# EAGLE board CAN shield (EAGLE 7.7.0)
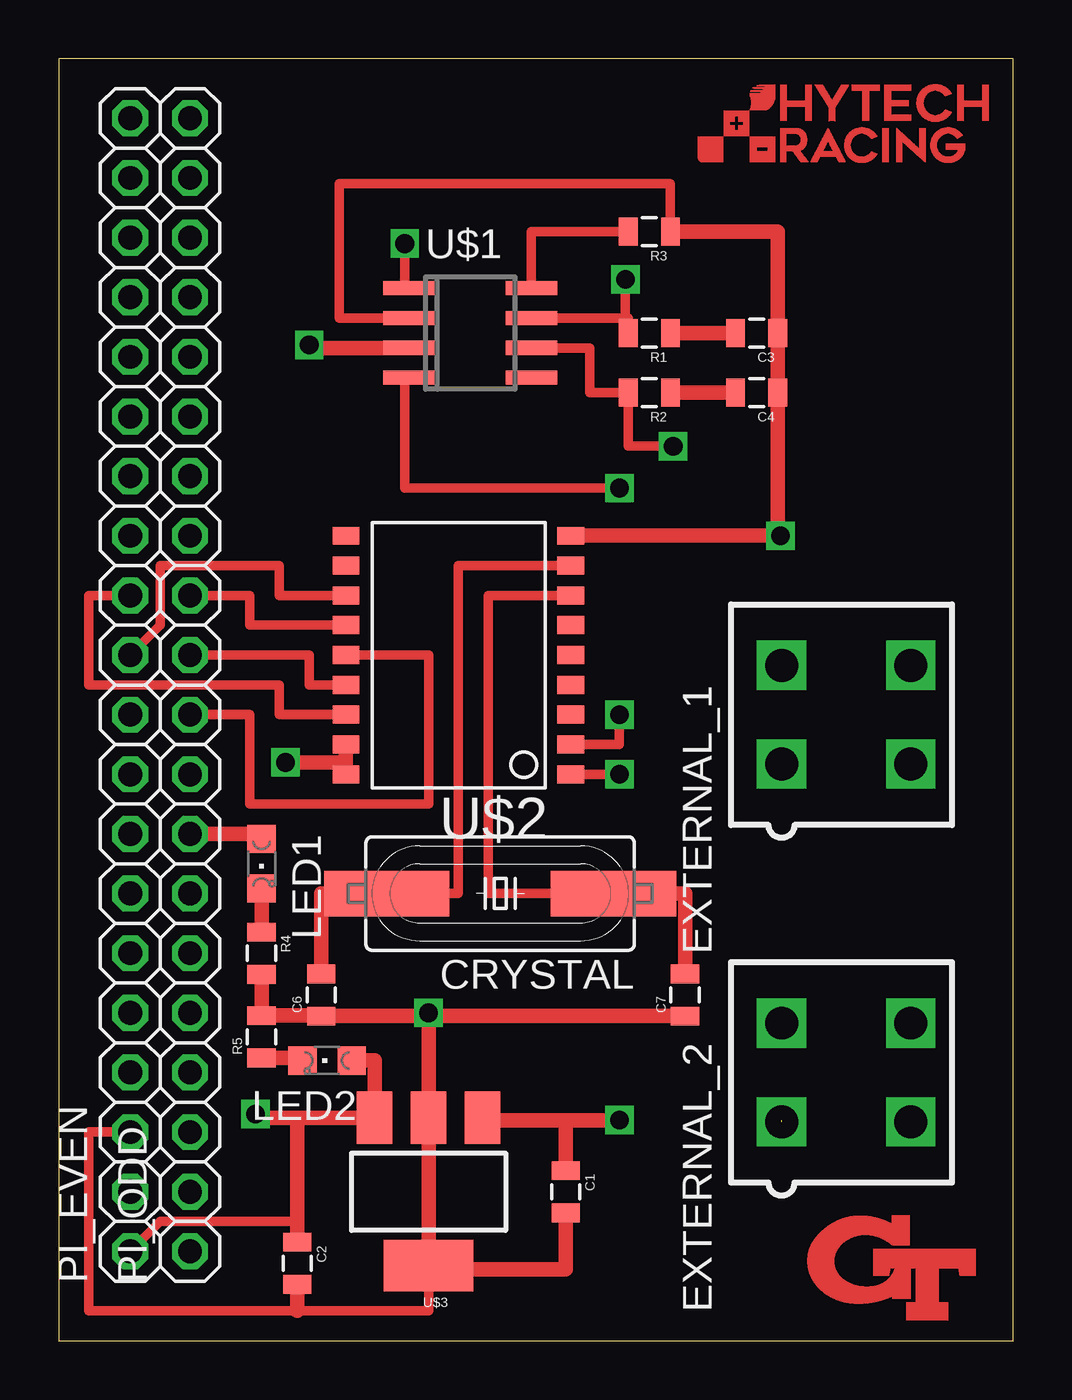
[diagram p0: board, top side]
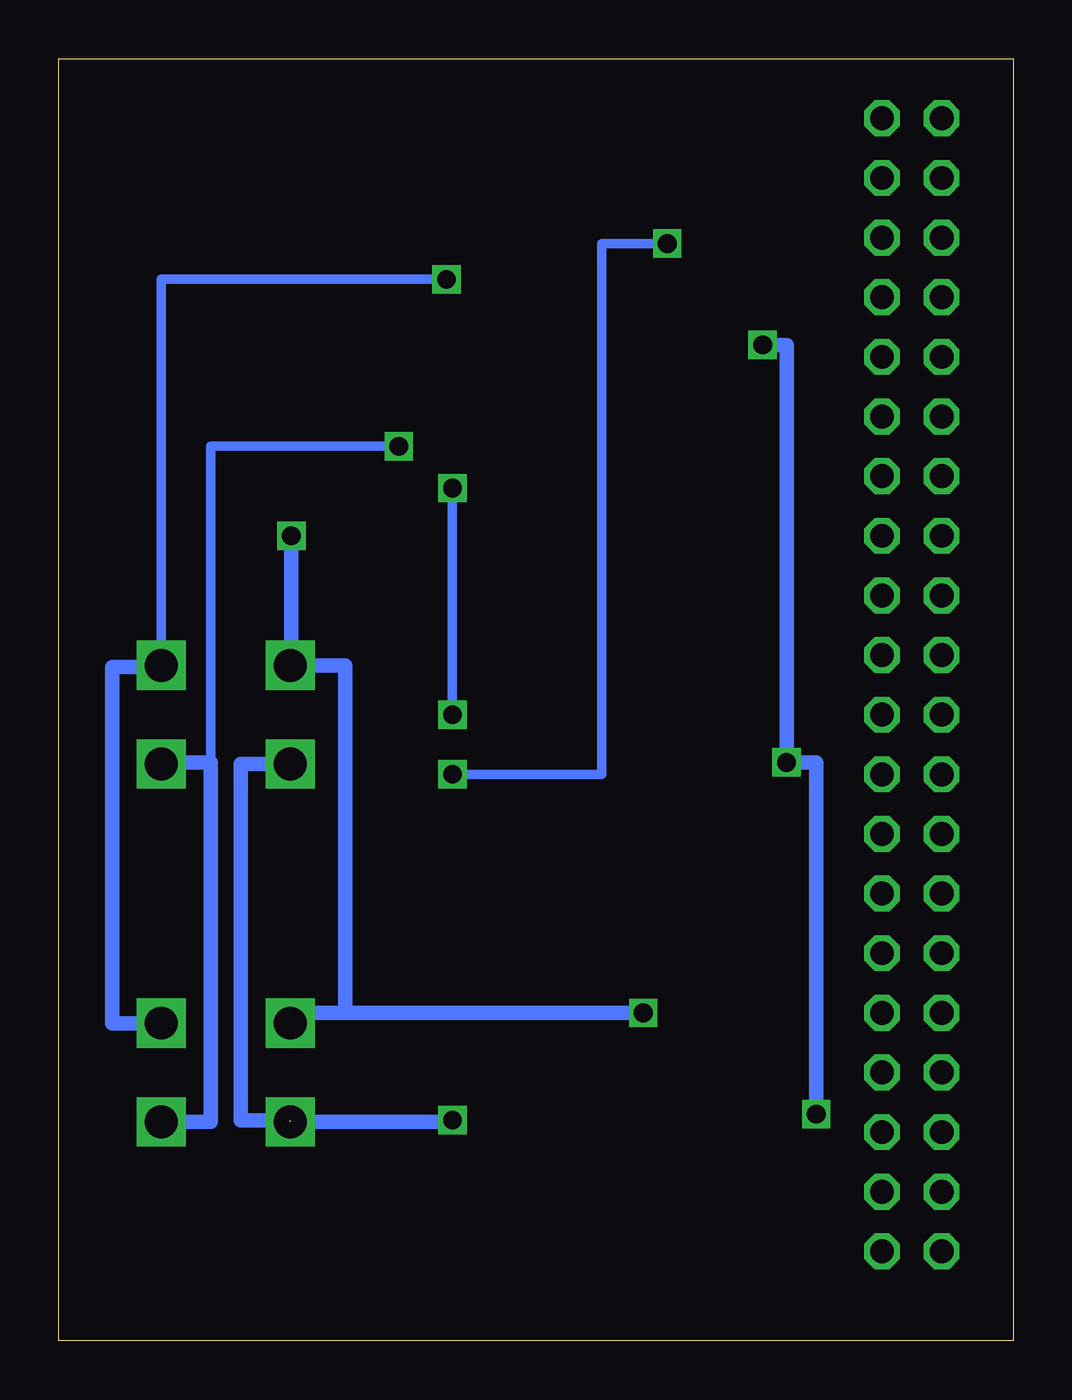
[diagram p1: board, bottom side, seen from below]

Size 40.64 x 54.61 mm. Coordinates in mm from the lower left corner, seen from the top.
Outline: 0,0 40.64,0 40.64,54.61 0,54.61 0,0
Copper layers (1*16): Top 0.035mm / dielectric 1.5mm / Bottom 0.035mm
Design rules "default": minimum track width 10mil, minimum drill 24mil, track to track 8mil, track to pad 8mil, pad to pad 8mil, via to via 8mil, smd to smd 8mil, copper to edge 40mil, drill to drill 8mil, minimum pad ring 10mil, minimum via ring 8mil, stop-mask expansion 4mil, vias tented up to drill 0mil, thermal gap 10mil

## Footprints (pad centres in the part's own frame; a part is rotated, then mirrored left to right if it is on the bottom)
0805 = smd 0.8 x 1.2: 1 -0.9,0; 2 0.9,0
HC49UP = smd 5.334 x 1.93: 1 -4.826,0; 2 4.826,0
MINIFIT_5566-4 = drill 1.4 square: 1 2.1,-2.75; 2 -2.1,-2.75; 3 2.1,2.75; 4 -2.1,2.75
LED-805 = smd 1.2 x 1.2: A 0,-1.05; C 0,1.05
1X20 = drill 1.016 octagon: 1 0,0; 2 2.54,0; 3 5.08,0; 4 7.62,0; 5 10.16,0; 6 12.7,0; 7 15.24,0; 8 17.78,0; 9 20.32,0; 10 22.86,0; 11 25.4,0; 12 27.94,0; 13 30.48,0; 14 33.02,0; 15 35.56,0; 16 38.1,0; 17 40.64,0; 18 43.18,0; 19 45.72,0; 20 48.26,0
SOIC-08 = smd 0.6 x 2.2: 1 -1.905,-2.6; 2 -0.635,-2.6; 3 0.635,-2.6; 4 1.905,-2.6; 5 1.905,2.6; 6 0.635,2.6; 7 -0.635,2.6; 8 -1.905,2.6
SOIC-18W = smd 0.762 x 1.143: 1 -5.08,-4.788; 2 -3.81,-4.788; 3 -2.54,-4.788; 4 -1.27,-4.788; 5 0,-4.788; 6 1.27,-4.788; 7 2.54,-4.788; 8 3.81,-4.788; 9 5.08,-4.788; 10 5.08,4.788; 11 3.81,4.788; 12 2.54,4.788; 13 1.27,4.788; 14 0,4.788; 15 -1.27,4.788; 16 -2.54,4.788; 17 -3.81,4.788; 18 -5.08,4.788
SOT223 = smd 1.5 x 2.235: 1 -2.3,-3.15; 2 0,-3.15; 3 2.3,-3.15 | smd 3.8 x 2.2: 4 0,3.15

## Placement (x,y rotation side)
C1  .22uF  [0805]  21.59,6.35 270 top
C2  .1uF  [0805]  10.16,3.3 270 top
C3  560pF  [0805]  29.72,42.93 180 top
C4  560pF  [0805]  29.72,40.39 180 top
C6  22pF  [0805]  11.18,14.73 90 top
C7  22pF  [0805]  26.67,14.73 90 top
CRYSTAL  16MHz  [HC49UP]  18.8,19.05 180 top
EXTERNAL_1  MINIFIT_5566-4  [MINIFIT_5566-4]  33.53,26.67 270 top
EXTERNAL_2  MINIFIT_5566-4  [MINIFIT_5566-4]  33.53,11.43 270 top
LED1  [LED-805]  8.64,20.32 180 top
LED2  [LED-805]  11.43,11.94 90 top
PI_EVEN  [1X20]  3.05,3.81 90 top
PI_ODD  [1X20]  5.59,3.81 90 top
R1  100  [0805]  25.15,42.93 180 top
R2  100  [0805]  25.15,40.39 180 top
R3  4.7k  [0805]  25.15,47.24 180 top
R4  150  [0805]  8.64,16.51 270 top
R5  150  [0805]  8.64,12.95 90 top
U$1  MCP2551  [SOIC-08]  17.53,42.93 270 top
U$2  MCP2515SMD  [SOIC-18W]  17.02,29.21 90 top
U$3  [SOT223]  15.75,6.35 180 top

## Library data of the parts
C1-C4 C6 C7 LED1 LED2 PI_EVEN PI_ODD R1-R5 U$1-U$3 = HyTechDevices
CRYSTAL = SparkFun-FreqCtrl
EXTERNAL_1 EXTERNAL_2 = HyTechDevices; OC_FARNELL: unknown; OC_NEWARK: unknown

## Nets
5VSUPPLY: C2.1 LED2.A PI_EVEN.1 U$1.3 U$2.17 U$2.18 U$3.3
CAN-H: EXTERNAL_1.4 EXTERNAL_2.4 R1.2 U$1.7
CAN-L: EXTERNAL_1.3 EXTERNAL_2.3 R2.2 U$1.6
CS: PI_EVEN.12 U$2.16
GND: C1.2 C2.2 C3.1 C4.1 C6.1 C7.1 EXTERNAL_1.2 EXTERNAL_2.2 PI_EVEN.3 R3.1 R4.2 R5.2 U$1.2 U$2.9 U$3.2 U$3.4
INT: PI_EVEN.11 U$2.12
N$1: LED1.C R4.1
N$2: PI_ODD.11 U$2.15
N$3: PI_ODD.10 U$2.14
N$4: PI_ODD.12 U$2.13
N$5: C1.1 EXTERNAL_1.1 EXTERNAL_2.1 U$3.1
N$6: LED1.A PI_ODD.8
N$7: LED2.C R5.1
N$11: C6.2 CRYSTAL.2 U$2.8
N$12: U$1.1 U$2.1
N$13: U$1.4 U$2.2
N$14: C3.2 R1.1
N$15: C7.2 CRYSTAL.1 U$2.7
N$16: R3.2 U$1.8
N$17: C4.2 R2.1

## Tracks (layer width: path | path; a pad name or v marks a point on that pad's centre or on a via)
5VSUPPLY  (via drill 0.8)
  Top 0.406: PI_EVEN.1 4.32,5.08 10.16,5.08
  Top 0.61: C2.1 10.16,5.08 10.16,9.5 | 10.16,9.5 U$3.3 13.45,11.94 LED2.A | 10.16,9.5 8.38,9.5 v8.38,9.65 | v9.65,24.64 12.23,24.64 | 12.23,24.64 U$2.17 | 12.23,24.64 U$2.18 | U$1.3 10.67,42.29 v10.67,42.42
  Bottom 0.61: v8.38,9.65 8.38,24.64 v9.65,24.64 9.65,42.42 v10.67,42.42
CAN-H  (via drill 0.8)
  Top 0.406: U$1.7 24.25,43.56 R1.2 24.13,42.93 v24.13,45.21
  Bottom 0.406: v24.13,45.21 36.28,45.21 EXTERNAL_1.4
  Bottom 0.61: EXTERNAL_2.4 38.35,13.53 38.35,28.7 36.28,28.7 EXTERNAL_1.4
CAN-L  (via drill 0.8)
  Top 0.406: U$1.6 22.61,42.29 22.61,40.39 R2.2 24.25,38.1 v26.16,38.1
  Bottom 0.406: v26.16,38.1 34.16,38.1 34.16,24.64
  Bottom 0.61: EXTERNAL_2.3 34.16,9.33 34.16,24.64 36.28,24.64 EXTERNAL_1.3
CS
  Top 0.406: U$2.16 9.4,26.67 9.4,27.94 1.27,27.94 1.27,31.75 PI_EVEN.12
GND  (via drill 0.8)
  Top 0.406: U$3.4 15.75,1.27 10.16,1.27 1.27,1.27 1.27,8.89 PI_EVEN.3 | U$1.2 11.94,43.56 11.94,49.28 26.05,49.28 R3.1 | 11.18,13.85 C6.1
  Top 0.61: 15.75,13.83 U$3.2 U$3.4 15.75,3.05 21.59,3.05 C1.2 | R3.1 30.62,47.24 C3.1 C4.1 30.62,34.29 | 15.75,13.83 v15.75,13.97 | C6.1 15.75,13.83 | C7.1 15.75,13.83 | C2.2 10.16,1.27 | U$2.9 30.62,34.29 | v30.73,34.29 30.62,34.29 | R4.2 R5.2 11.18,13.85
  Bottom 0.61: v15.75,13.97 28.45,13.97 | 28.45,13.97 30.78,13.97 EXTERNAL_2.2 | 28.45,13.97 28.45,28.77 EXTERNAL_1.2 30.73,28.77 v30.73,34.29
INT
  Top 0.406: U$2.12 9.4,31.75 9.4,33.02 4.32,33.02 4.32,30.48 PI_EVEN.11
N$1
  Top 0.61: LED1.C R4.1
N$2
  Top 0.406: U$2.15 10.67,27.94 10.67,29.21 PI_ODD.11
N$3
  Top 0.406: U$2.14 15.75,29.21 15.75,22.86 8.13,22.86 8.13,26.67 PI_ODD.10
N$4
  Top 0.406: U$2.13 8.13,30.48 8.13,31.75 PI_ODD.12
N$5  (via drill 0.8)  (1 unrouted)
  Top 0.61: v23.88,9.4 21.59,9.4 | C1.1 21.59,9.4 | 21.59,9.4 18.05,9.4 U$3.1
  Bottom 0.61: EXTERNAL_1.1 32.89,24.57 32.89,9.4 30.78,9.4 | EXTERNAL_2.1 23.88,9.33 v23.88,9.4
N$6
  Top 0.406: 8.64,21.59 LED1.A
  Top 0.61: PI_ODD.8 8.64,21.59
N$7
  Top 0.406: 10.38,12.05 LED2.C
  Top 0.61: R5.1 10.38,12.05
N$11
  Top 0.406: U$2.8 17.02,33.02 17.02,19.05 CRYSTAL.2
  Top 0.61: C6.2 11.18,19.05 CRYSTAL.2
N$12  (via drill 0.8)
  Top 0.406: 14.73,44.83 v14.73,46.74 | v23.88,24.13 U$2.1
  Top 0.61: U$1.1 14.73,44.83
  Bottom 0.406: v14.73,46.74 17.53,46.74 17.53,24.13 v23.88,24.13
N$13  (via drill 0.8)
  Top 0.406: U$1.4 14.73,41.02 14.73,36.32 v23.88,36.32 | v23.88,26.67 23.88,25.4 U$2.2
  Bottom 0.406: v23.88,36.32 v23.88,26.67
N$14
  Top 0.61: C3.2 R1.1
N$15
  Top 0.406: CRYSTAL.1 18.29,19.05 18.29,31.75 U$2.7
  Top 0.61: C7.2 26.67,19.05 CRYSTAL.1
N$16
  Top 0.406: R3.2 20.13,47.24 U$1.8
N$17
  Top 0.61: C4.2 R2.1
(copper drawn outside any net)
  shapes: Top area x3696